# Altium PCB STM32PCB_brd.PcbDoc
Units mm, origin at the board's own origin, x right, y up, seen from the top; angles counter-clockwise.
Board outline 36 x 36 mm, 4 copper layers (L1 (Signal), L2 (GND), L2 (GND) (Mid2), L4 (Signal)), stack 1.57 mm thick; 35 components, 27 nets, 172 pads, 80 vias.
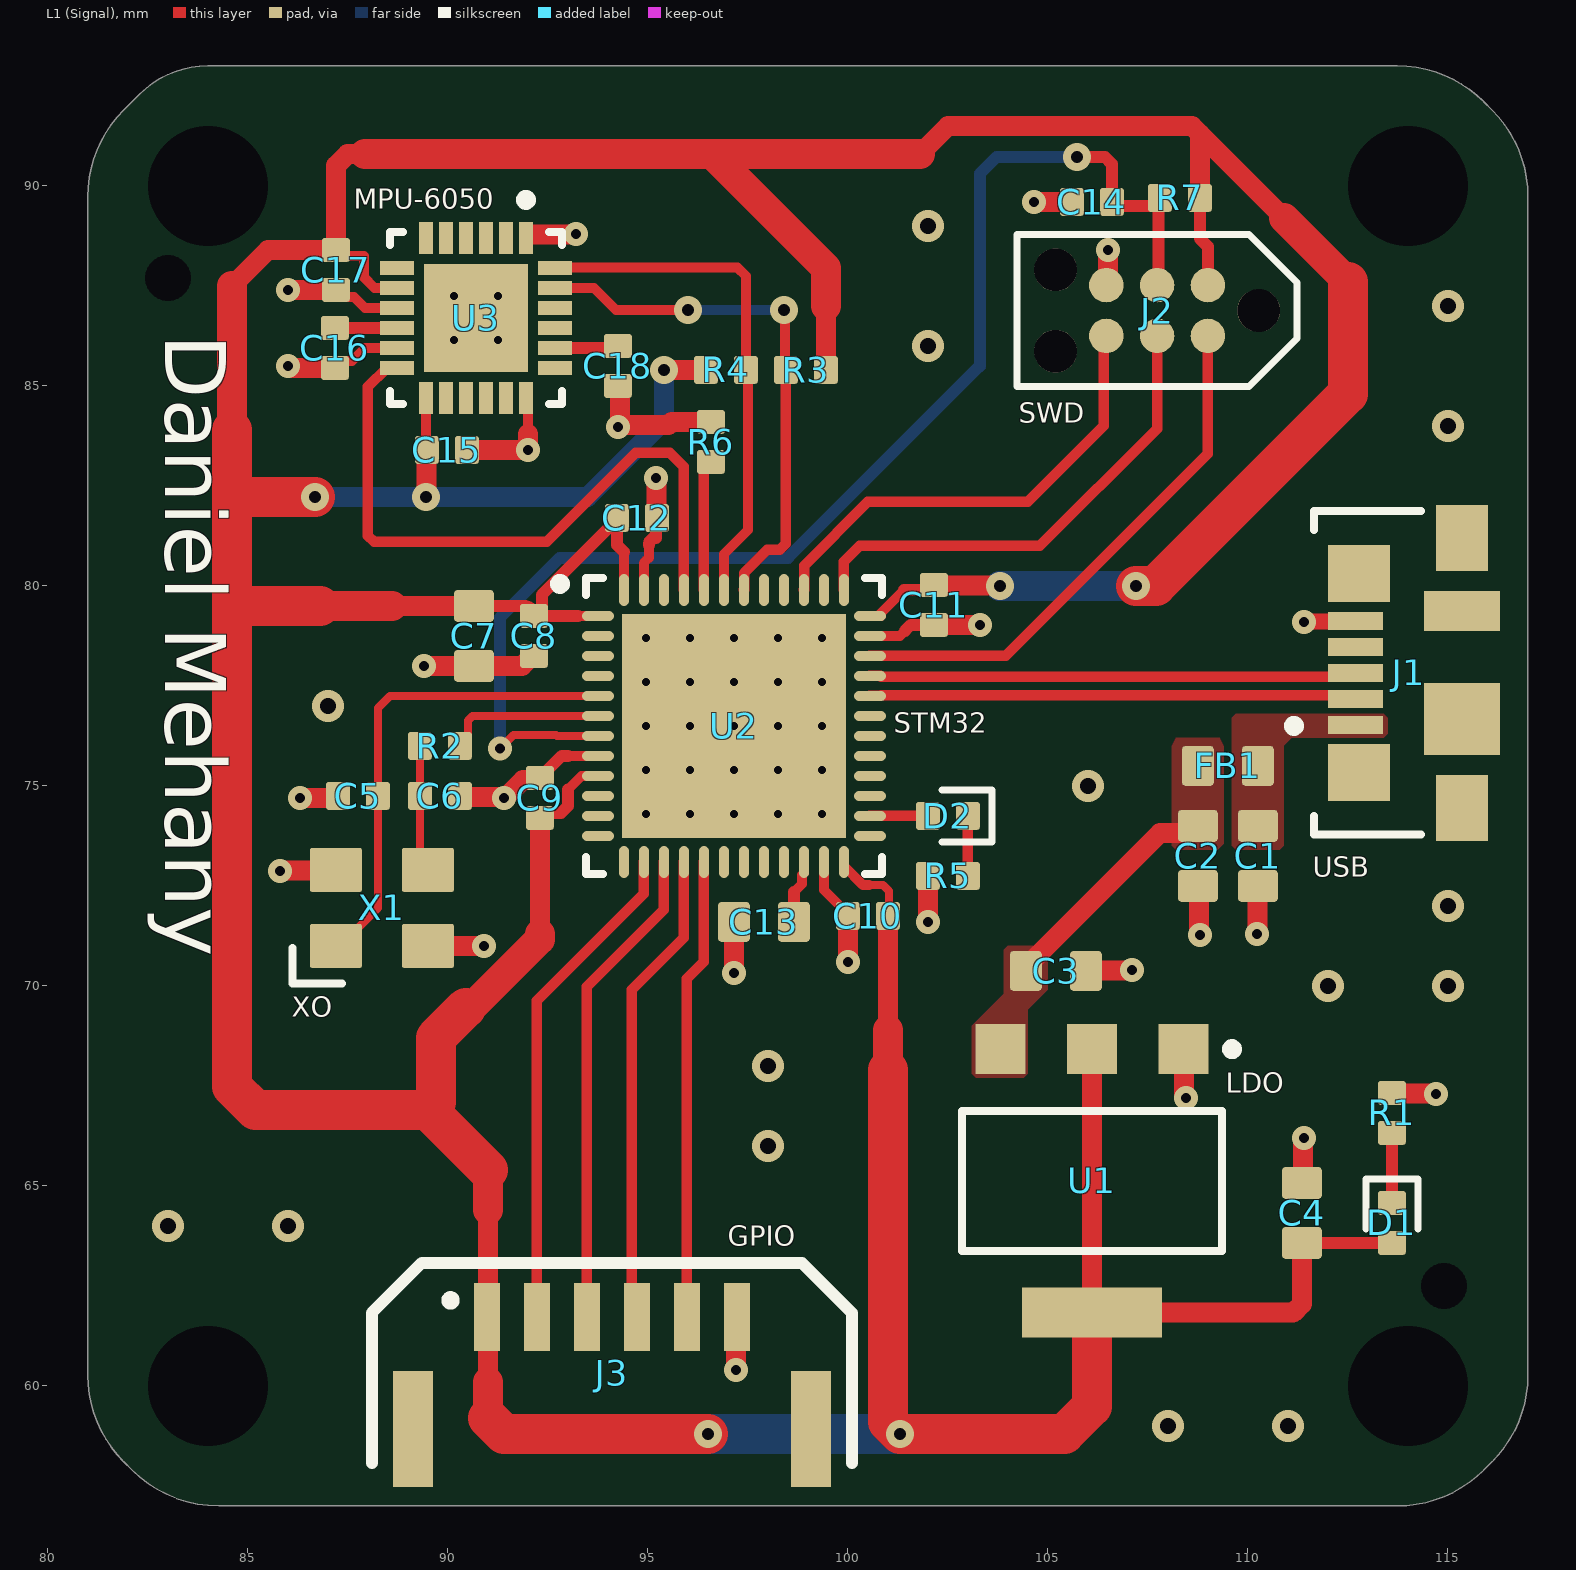
[diagram p0: L1 (Signal) view]
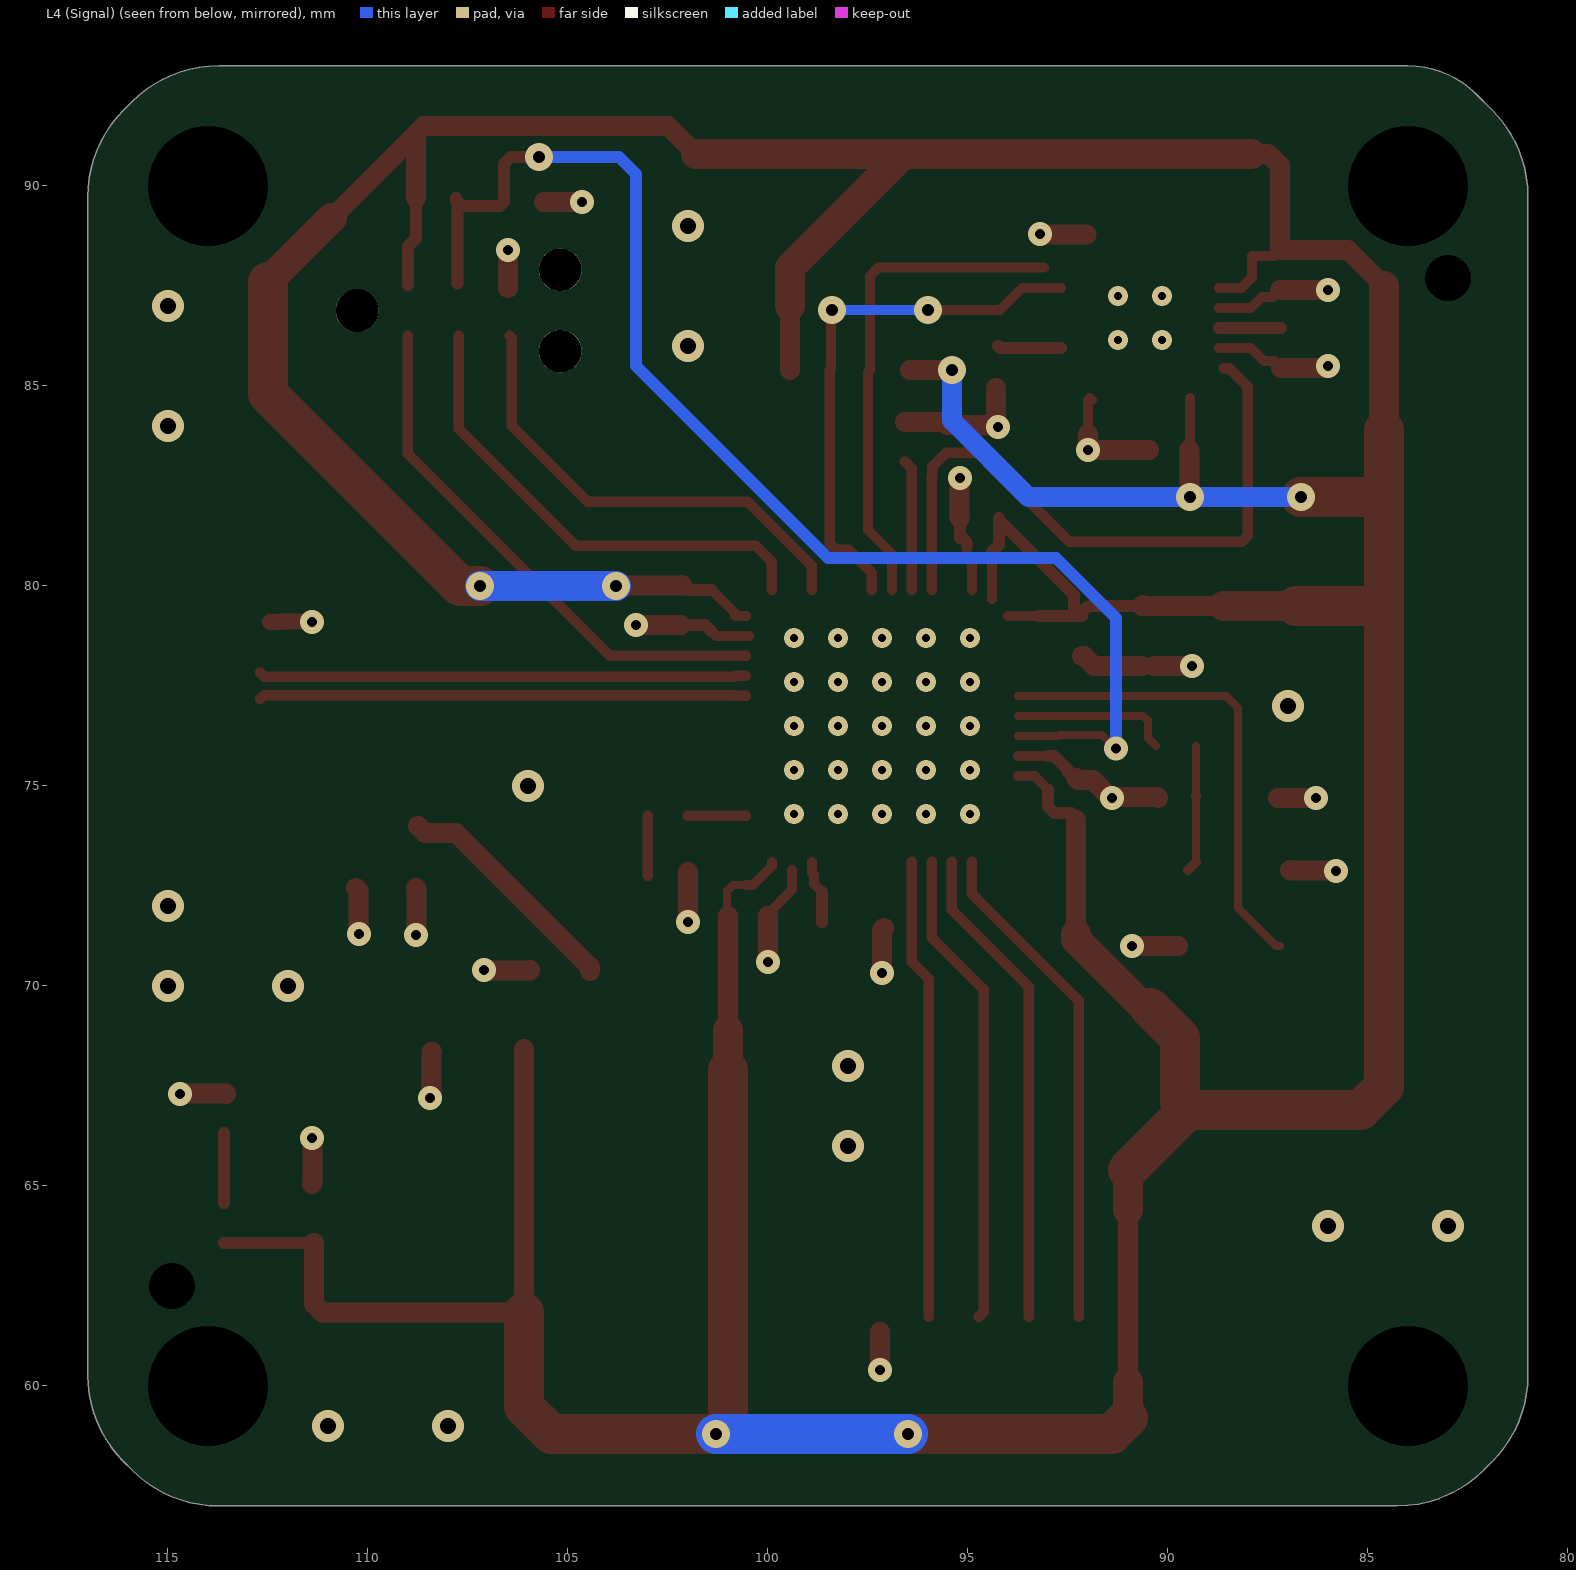
[diagram p1: L4 (Signal) view, seen from below]
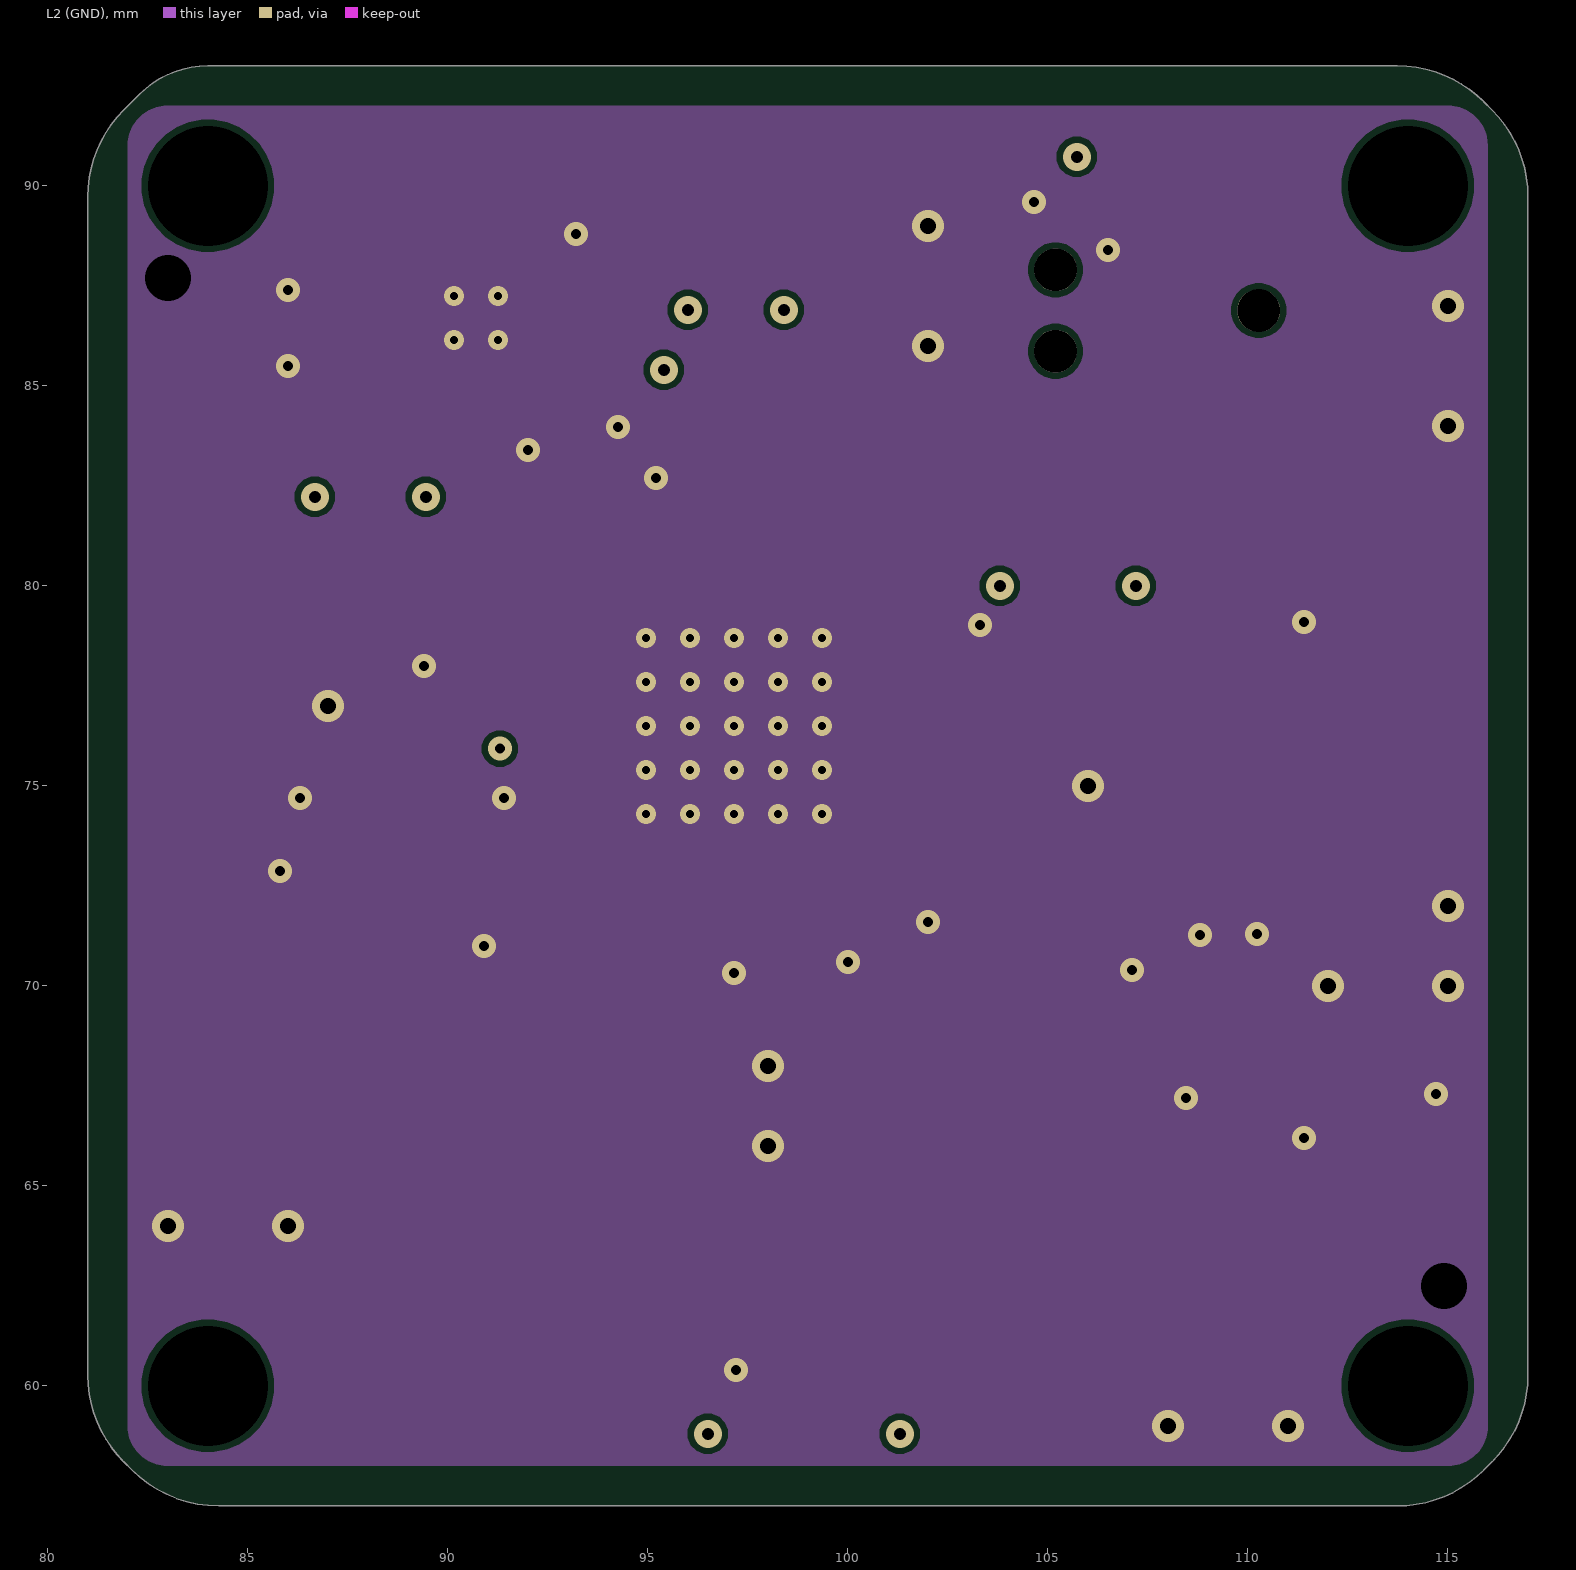
[diagram p2: L2 (GND)]
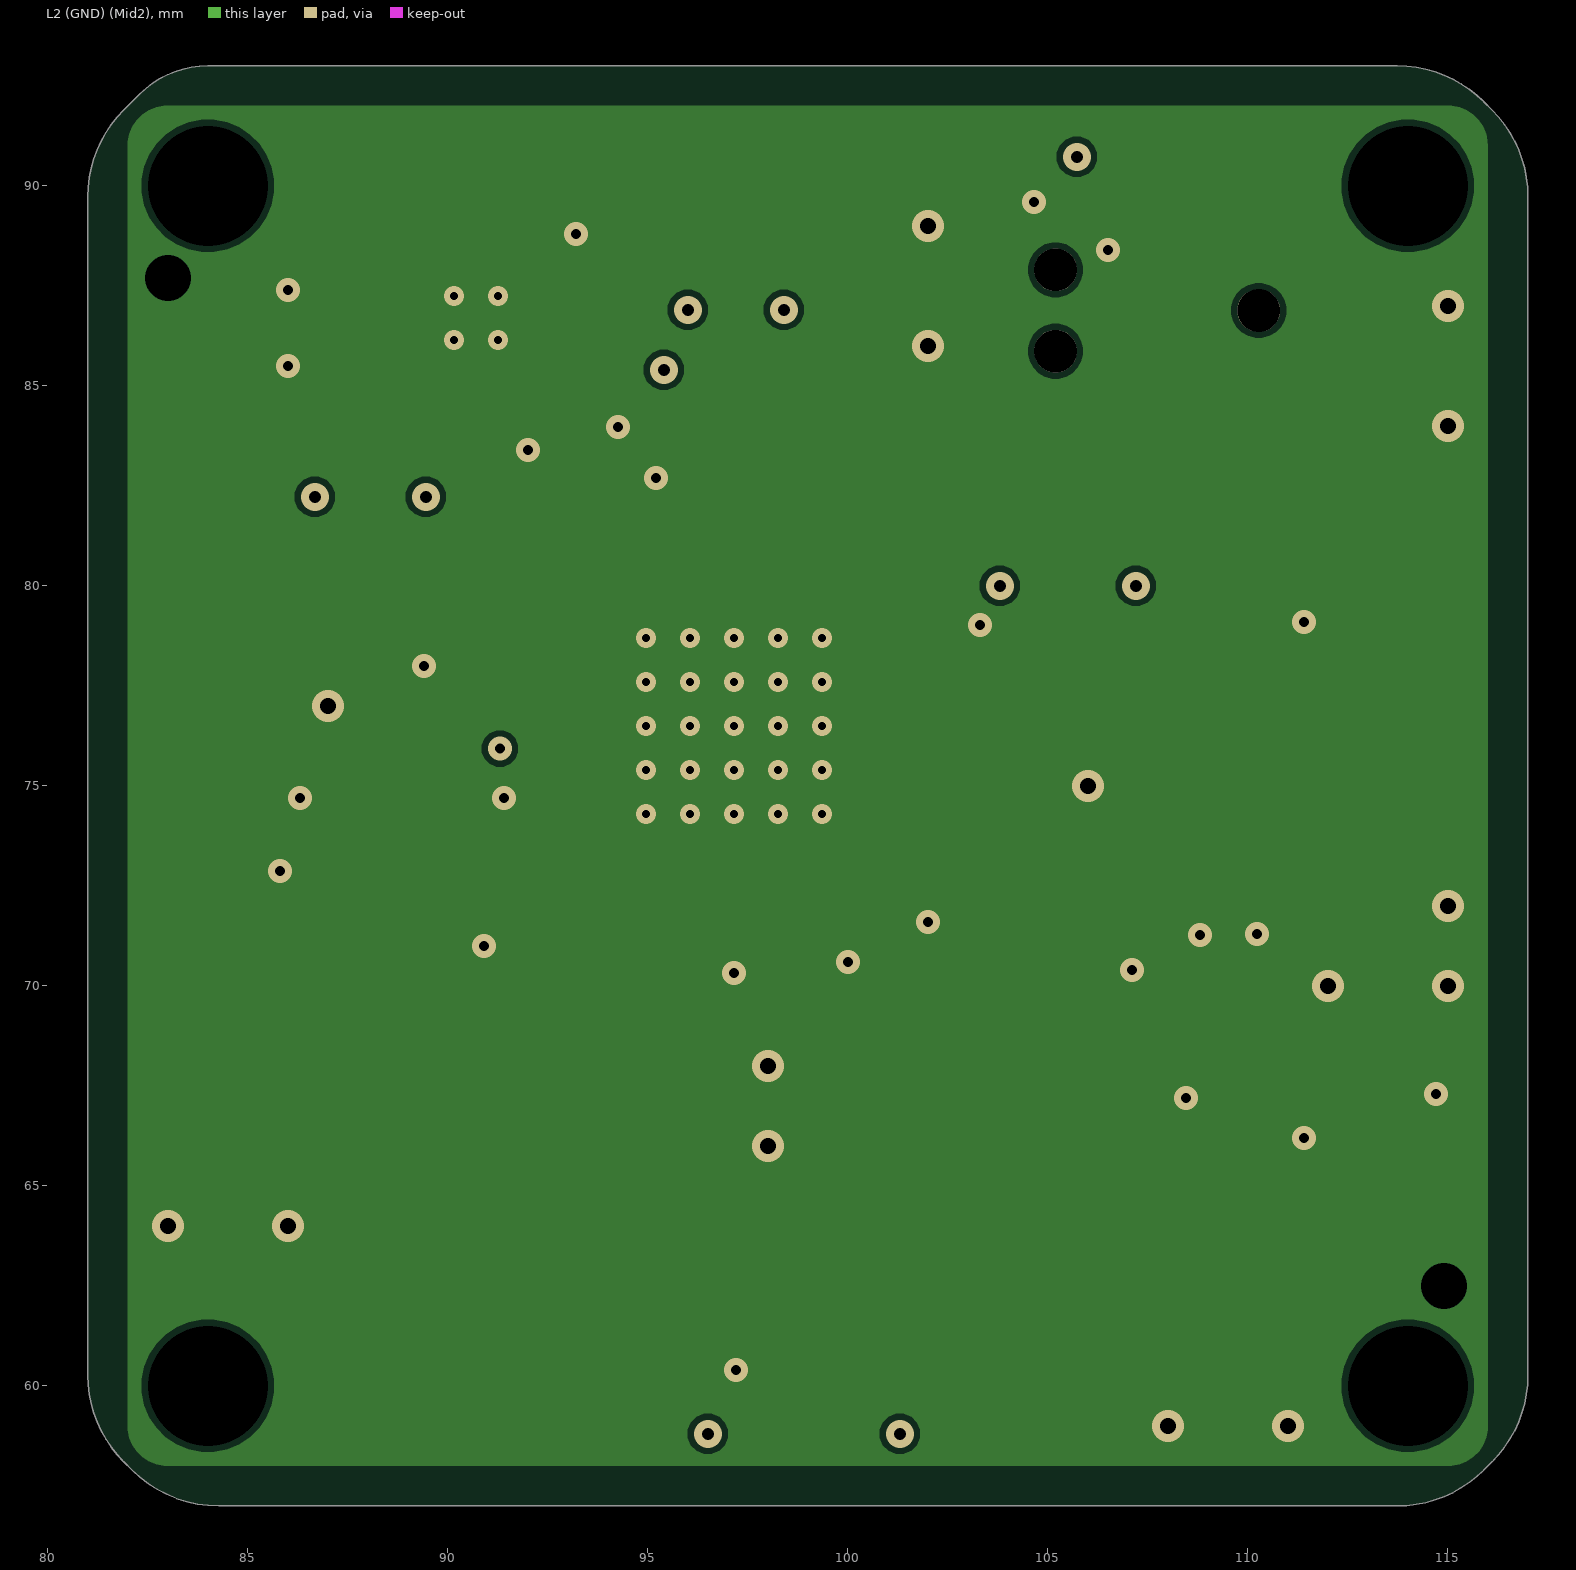
[diagram p3: L2 (GND) (Mid2)]
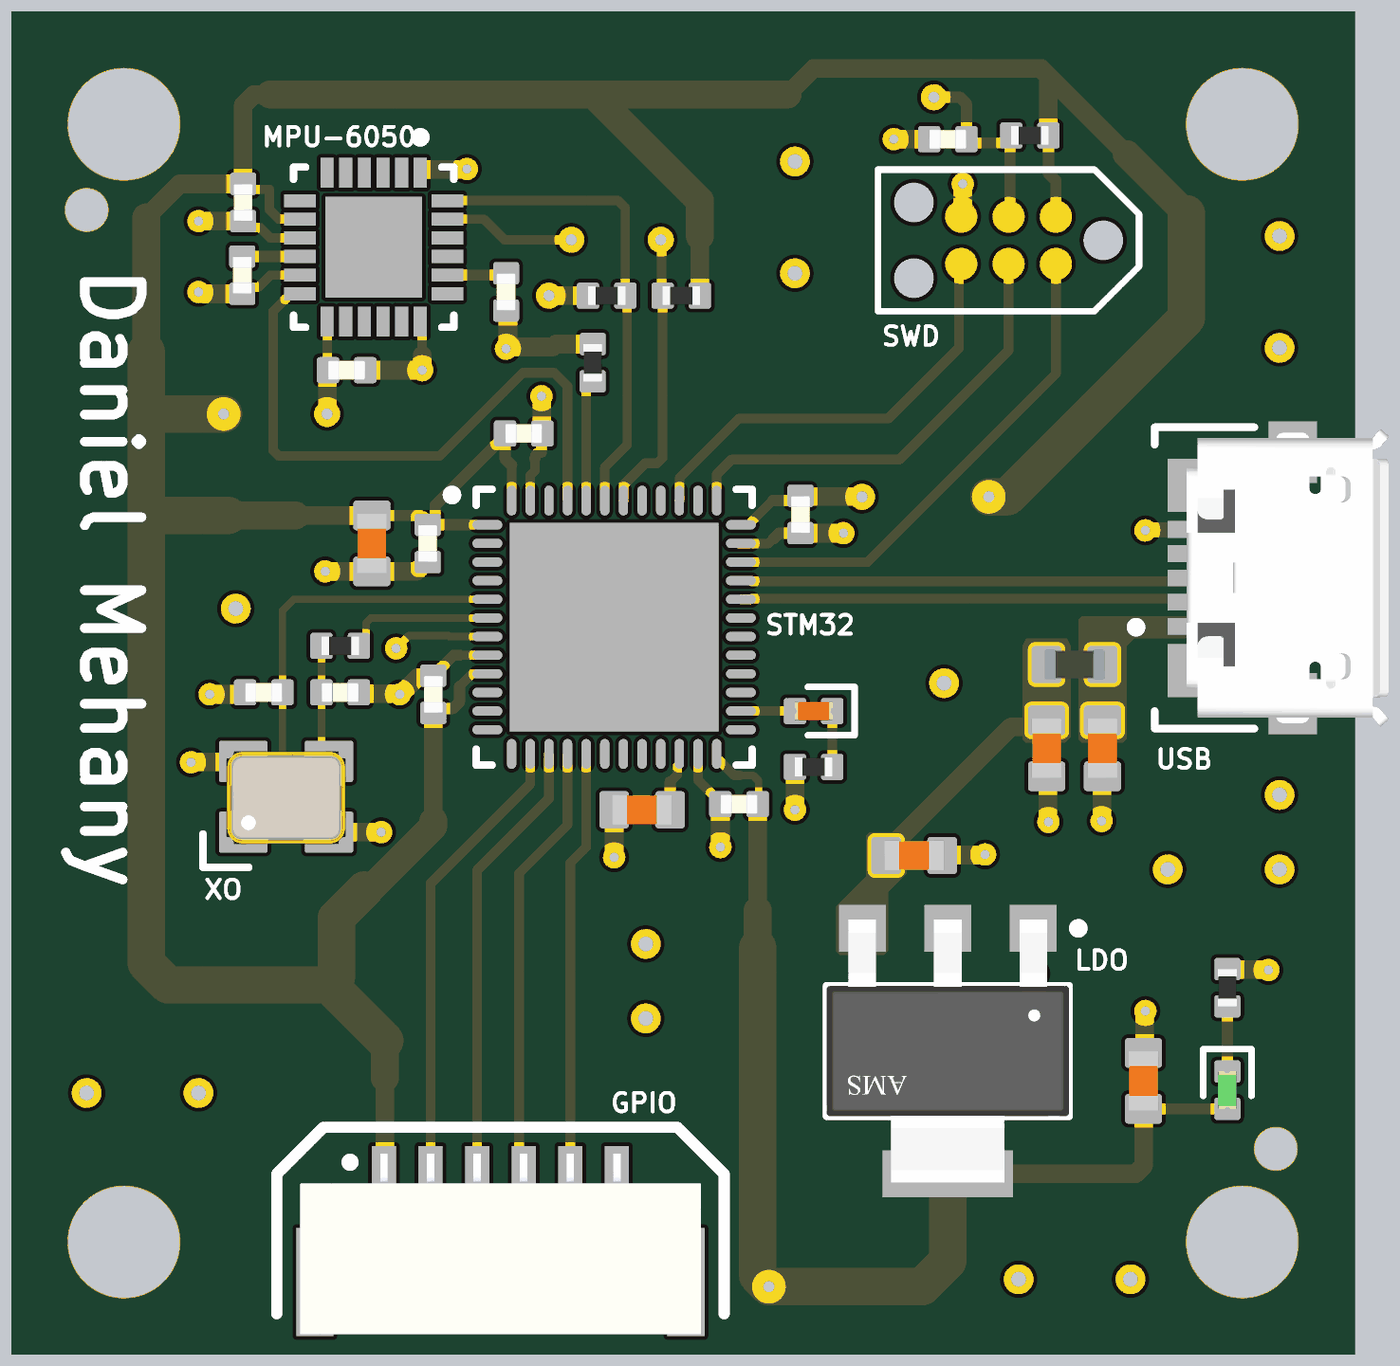
[diagram p4: 3D render of the assembled board from above, using the file's embedded part models]

## Layer stack, top to bottom
Top Solder: solder mask 0.0254, SM-001, Dk 4
L1 (Signal): signal copper 0.035
Dielectric 1: prepreg 0.2, PP-017, Dk 4.6
L2 (GND): signal copper 0.0175
Dielectric 3: core 1.065, Core-039, Dk 4.6
L2 (GND) (Mid2): signal copper 0.0175
Dielectric 5: prepreg 0.2, PP-017, Dk 4.6
L4 (Signal): signal copper 0.035
Bottom Solder: solder mask 0.0254, SM-001, Dk 4

## Board outline
81.898,58.102 cw(c84.066,60.27) 81,60.27 81,89.73 cw(c84.066,89.73) 81.898,91.898 82.293,92.293 cw(c84,90.586) 84,93 113,93 113.73,93 cw(c113.73,89.934) 115.898,92.102 116.102,91.898 cw(c113.934,89.73) 117,89.73 117,60.27 cw(c113.934,60.27) 116.102,58.102 115.898,57.898 cw(c113.73,60.066) 113.73,57 84.27,57 cw(c84.27,60.066) 82.102,57.898

## Design rules (kind name [scope] priority, off if disabled: settings)
Clearance [All] p1: gap=0.15 ignorepadtopadclearanceinfootprint=FALSE
DiffPairsRouting [All] p1: maxlimit=0.254 minlimit=0.203 mostfreqgap=0.254 toplayer_maxgap=0.203 toplayer_prefgap=0.203 toplayer_minwidth=0.26 toplayer_maxwidth=0.26 toplayer_prefwidth=0.26 bottomlayer_maxgap=0.203 bottomlayer_prefgap=0.203 bottomlayer_minwidth=0.26 bottomlayer_maxwidth=0.26 bottomlayer_prefwidth=0.26 impedanceprofiledriven=TRUE impedanceprofileid={F5B45818-6CCE-4C37-A667-58EC9C0AF77E} impedanceprofilevalue=90.000000 maxuncoupledlength=12.7
HoleSize [All] p1: absolutevalues=TRUE maxlimit=3 minlimit=0.2 maxpercent=80.000 minpercent=20.000
MinimumSolderMaskSliver [All] p1: minsoldermaskwidth=0
PolygonConnect [All] p1: connectstyle=Direct reliefconductorwidth=0.254 reliefentries=4 polygonreliefangle="90 Angle" airgapwidth=0.254
RoutingVias [All] p1: holewidth=0.3 width=0.7 viastyle="Through Hole" minholewidth=0.25 minwidth=0.55 maxholewidth=0.4 maxwidth=0.9
SilkToSilkClearance [All] p1: silktosilkclearance=0.15
SilkToSolderMaskClearance [IsPad] p1: minsilkscreentomaskgap=0.15 clearancetoexposedcopper=TRUE
SolderMaskExpansion [All] p1: expansion=0.102 istentingtop=FALSE
SupplyNets "Schematic Supply Nets_4" [InNet('+5V')] p1: voltage=0.000
SupplyNets "Schematic Supply Nets_3" [InNet('+3.3V')] p2: voltage=0.000
SupplyNets "Schematic Supply Nets_1" [InNet('VBUS')] p3: voltage=0.000
SupplyNets "Schematic Supply Nets" [InNet('GND')] p4: voltage=0.000
UnRoutedNet [All] p1: checkbadconnections=TRUE
Width [All] p1: maxlimit=1 minlimit=0.2 preferedwidth=0.3 midlayer1_minwidth=0.254 midlayer1_maxwidth=0.254 midlayer1_prefwidth=0.254 midlayer2_minwidth=0.254 midlayer2_maxwidth=0.254 midlayer2_prefwidth=0.254 minimp=50.000000 maximp=50.000000 favimp=50.000000
24 further rules are at their usual default settings.

## Classes and differential pairs
differential pair USB_D: +USB_D_P -USB_D_N

## Components (designator, comment, footprint, x,y, rotation, side; value= is the part's Value field where it differs from the comment)
C1 "2.2u" CAP_0603 110.25,73.25 r90 top
C2 "2.2u" CAP_0603 108.75,73.25 r90 top
C3 "22u" CAP_0603 105.2,70.375 r180 top
C4 "22u" CAP_0603 111.35,64.325 r270 top
C5 "10p" CAP_0402 87.75,74.75 r0 top
C6 "10p" CAP_0402 89.8,74.75 r180 top
C7 "2.2u" CAP_0603 90.65,78.75 r90 top
C8 "C0402_16V" CAP_0402 92.15,78.75 r90 top value=100n
C9 "C0402_16V" CAP_0402 92.3,74.7 r270 top value=100n
C10 "C0402_16V" CAP_0402 100.5,71.75 r0 top value=100n
C11 "C0402_16V" CAP_0402 102.15,79.525 r90 top value=100n
C12 "C0402_16V" CAP_0402 94.725,81.7 r180 top value=100n
C13 "2.2u" CAP_0603 97.9,71.6 r0 top
C14 "C0402_16V" CAP_0402 106.1,89.6 r0 top value=100n
C15 "C0402_16V" CAP_0402 89.975,83.4 r180 top value=100n
C16 "C0402_16V" CAP_0402 87.175,85.95 r90 top value=100n
C17 "C0402_16V" CAP_0402 87.2,87.9 r90 top value=10n
C18 "C0402_16V" CAP_0402 94.25,85.5 r90 top value=2.2n
D1 "GREEN" LED_0402_GREEN 113.6,64.075 r90 top
D2 "RED" LED_0402_RED 102.5,74.25 r0 top
FB1 "120R" FB_0603 109.5,75.5 r180 top
J1 "473460001" FP-473460001-MFG 115,77.825 r90 top
J2 "TC2030-NL" TC2030-NL-FP 107.73,86.885 r180 top
J3 "SM06B-GHS-TB" SM06B-GHS-TB 94.1,60.325 r0 top
R1 "1K" RES_0402 113.6,66.825 r270 top
R2 "0R" RES_0402 89.8,76 r0 top
R3 "2.2K" RES_0402 98.95,85.4 r0 top
R4 "2.2K" RES_0402 96.95,85.4 r180 top
R5 "1K" RES_0402 102.5,72.75 r0 top
R6 "10k" RES_0402 96.575,83.6 r270 top
R7 "10k" RES_0402 108.3,89.7 r0 top
U1 "AMS1117-3.3" FP-AMS1117-IPC_C 106.1,65.125 r270 top
U2 "STM32F411CEU6" STM-UFQFPN48_L 97.15,76.5 r0 top
U3 "MPU-6050" IS-QFN-24_V 90.7,86.7 r270 top
X1 "24MHz" XTAL_3225 88.35,71.95 r0 top

## Footprints (in the part's own frame and the unit in brackets; to place one, negate y for a bottom-side part, rotate by r counter-clockwise, add the part's x,y. Pads: shape width x height; smd on the part's side, far side on the other; paste and mask are expansions set on the pad)
CAP_0402 [mm]
  rrect25% 0.6x0.7 smd: 1(-0.5,0) 2(0.5,0)
  body extent -0.5,-0.26 0.5,0.26, height 0.37
CAP_0603 [mm]
  rrect25% 0.8x1 smd: 1(-0.75,0) 2(0.75,0)
  body extent -0.8,-0.4 0.8,0.4, height 0.51
FB_0603 [mm]
  rrect25% 0.8x1 smd: 1(-0.75,0) 2(0.75,0)
  body extent -0.8,-0.4 0.8,0.4, height 0.81
FP-473460001-MFG [mm]
  rect 0.45x1.38 smd paste+0 mask+0: 1(-1.3,2.31) 2(-0.65,2.31) 3(0,2.31) 4(0.65,2.31) 5(1.3,2.31)
  rect 1.425x1.55 smd paste+0 mask+0: 6(-2.488,2.225) 7(2.488,2.225)
  rect 1.65x1.3 smd paste+0 mask+0: 8(-3.375,-0.35) 11(3.375,-0.35)
  rect 1.8x1.9 smd paste+0 mask+0: 9(-1.15,-0.35)
  rect 1x1.9 smd paste+0 mask+0: 10(1.55,-0.35)
  silkscreen extent -4.05,0.67 4.05,3.97, body extent -4.3,-2.48 4.3,3.45, height 0.25
FP-AMS1117-IPC_C [mm]
  rect 1.25x1.25 smd paste-2539.97 mask-2539.97: 1(-3.295,2.29) 2(-3.295,0) 3(-3.295,-2.29)
  rect 1.25x3.5 smd paste+0 mask+0: 4(3.295,0)
  silkscreen extent -3.42,-3.25 1.75,3.63, body extent -3.9,-3.35 3.9,3.35, height 0.25
IS-QFN-24_V [mm] "QFN, 24-Leads, Body 4x4mm, Pitch 0.5mm, Thermal Pad 2.7x2.6mm"
  rect 0.8x0.35 smd: 1(-2,1.25) 2(-2,0.75) 3(-2,0.25) 4(-2,-0.25) 5(-2,-0.75) 6(-2,-1.25) 13(2,-1.25) 14(2,-0.75) 15(2,-0.25) 16(2,0.25) 17(2,0.75) 18(2,1.25)
  rect 0.35x0.85 smd mask+0.102: 7(-1.25,-1.975) 8(-0.75,-1.975) 9(-0.25,-1.975) 10(0.25,-1.975) 11(0.75,-1.975) 12(1.25,-1.975) 19(1.25,1.975) 20(0.75,1.975) 21(0.25,1.975) 22(-0.25,1.975) 23(-0.75,1.975) 24(-1.25,1.975)
  rect 2.7x2.6 smd: 25(0,0)
  silkscreen extent -3.07,-2.15 2.15,2.15, body extent -2,-2 2,2, height 0.95
LED_0402_GREEN [mm]
  rrect25% 0.6x0.7 smd: A(-0.5,0) K(0.5,0)
  silkscreen extent -0.15,-0.65 1.1,0.65, body extent -0.51,-0.25 0.51,0.25, height 0.45
LED_0402_RED [mm]
  rrect25% 0.6x0.7 smd: A(-0.5,0) K(0.5,0)
  silkscreen extent -0.15,-0.65 1.1,0.65, body extent -0.51,-0.25 0.51,0.25, height 0.45
RES_0402 [mm]
  rrect25% 0.6x0.7 smd: 1(-0.5,0) 2(0.5,0)
  body extent -0.5,-0.25 0.5,0.25, height 0.3
SM06B-GHS-TB [mm]
  rect 0.65x1.7 smd: 1(-3.125,1.4) 2(-1.875,1.4) 3(-0.625,1.4) 4(0.625,1.4) 5(1.875,1.4) 6(3.125,1.4)
  rect 1x2.9 smd: ""(-4.975,-1.4) ""(4.975,-1.4)
  silkscreen extent -6,-2.25 6,2.75, body extent -5.38,-2.8 5.38,2.05, height 4.26
STM-UFQFPN48_L [mm] "QFN, 48-Leads, Body 7.1x7.1mm, Pitch 0.5mm, Thermal Pad 5.6x5.6mm, IPC High Density"
  oval 0.8x0.25 smd: 1(-3.4,2.75) 2(-3.4,2.25) 3(-3.4,1.75) 4(-3.4,1.25) 5(-3.4,0.75) 6(-3.4,0.25) 7(-3.4,-0.25) 8(-3.4,-0.75) 9(-3.4,-1.25) 10(-3.4,-1.75) 11(-3.4,-2.25) 12(-3.4,-2.75) 25(3.4,-2.75) 26(3.4,-2.25) 27(3.4,-1.75) 28(3.4,-1.25) 29(3.4,-0.75) 30(3.4,-0.25) 31(3.4,0.25) 32(3.4,0.75) 33(3.4,1.25) 34(3.4,1.75) 35(3.4,2.25) 36(3.4,2.75)
  oval 0.25x0.8 smd: 13(-2.75,-3.4) 14(-2.25,-3.4) 15(-1.75,-3.4) 16(-1.25,-3.4) 17(-0.75,-3.4) 18(-0.25,-3.4) 19(0.25,-3.4) 20(0.75,-3.4) 21(1.25,-3.4) 22(1.75,-3.4) 23(2.25,-3.4) 24(2.75,-3.4) 37(2.75,3.4) 38(2.25,3.4) 39(1.75,3.4) 40(1.25,3.4) 41(0.75,3.4) 42(0.25,3.4) 43(-0.25,3.4) 44(-0.75,3.4) 45(-1.25,3.4) 46(-1.75,3.4) 47(-2.25,3.4) 48(-2.75,3.4)
  rect 5.6x5.6 smd: 49(0,0)
  silkscreen extent -4.47,-3.7 3.7,3.7, body extent -3.55,-3.55 3.55,3.55, height 0.6
TC2030-NL-FP [mil]
  round 33.98 smd paste-16.99: 1(-50,-25) 2(-50,25) 3(0,-25) 4(0,25) 5(50,-25) 6(50,25)
  round 42.01 hole 42.01 unplated: MH(-100,0) MH(100,-40) MH(100,40)
  silkscreen extent -138,-75 138,75
XTAL_3225 [mm]
  rrect10% 1.3x1.1 smd: 1(-1.15,-0.95) 2(1.15,-0.95) 3(1.15,0.95) 4(-1.15,0.95)
  silkscreen extent -2.23,-1.89 -1,-1, body extent -1.6,-1.28 1.6,1.22, height 0.61

## Part data
C1 C2 C3 C4 C7 C13: library part CAP_0603, "Capacitor SMD 0603"
C5 C6 C8 C9 C10 C11 C12 C14 C15 C16 C17 C18: library part CAP_0402, "Capacitor SMD 0402"
D1: library part LED_0402_GREEN, "LED 0402 GREEN SMD"
D2: library part LED_0402_RED, "LED 0402 RED SMD"
FB1: library part FB_0603, "Ferrite Bead SMD 0603"
J1: library part CMP-2000-05246-2, "CONN RCPT USB2.0 MICRO B SMD R/A", Current Rating=1.8A, Manufacturer=Molex, Package=0, Temperature="-30°C to +85°C", Temperature Range High=+85°C, Temperature Range Low=-30°C, Voltage Rating=30V, Automotive=No, Category=Conn, ComponentLink2Description=Datasheet, ComponentLink2URL=https://www.molex.com/webdocs/datasheets/pdf/en-us/0473460001_IO_CONNECTORS.pdf, Conn Orientation="Right Angle", Contact Material=Gold,Nickel, Device Class L1=Connectors, Device Class L2="USB Connectors", Device Class L3=unset, Digikey Description="CONN RCPT USB2.0 MICRO B SMD R/A", Footprint Url=https://www.molex.com/pdm_docs/sd/473460001_sd.pdf, Height=2.945mm, Is Female=yes, Lead Free=Yes, Manufacturer Part Number=473460001, Number Of Contacts=5, Octopart=https://octopart.com/47346-0001-molex-7164928, Pitch=0.65mm, RoHS=TRUE, Shielding=true, Usb Standard="USB 2.0"
J2: "Tag-Connect No-Solder SWD Debug Connector (No Legs) DO NOT PLACE", Manufacturer=Tag-Connect, Manufacturer Part Number=TC2030-NL-FP
J3: "Header Connector 6 Position 1.25MM Pitch SMD Horizontal JST GH", Manufacturer=JST, Manufacturer Part Number=SM06B-GHS-TB
R1 R2 R3 R4 R5 R6 R7: library part RES_0402, "Resistor SMD 0402"
U1: library part CMP-209535-000001-1, "LDO Voltage Regulators 1A, 3.3V", Dropout Voltage=1.1V, Manufacturer="Advanced Monolithic Systems", Max Junction Temp=+125°C, Max Power Dissipation=1.2W, Max Supply Voltage=15V, Nominal Supply Current=5mA, Output Current=1A, Output Voltage=3.3V, Package=AMS1117, Temperature="-40°C to +125°C", Temperature Range Low=-40°C, Automotive=No, Category=IC, ComponentLink2Description=Datasheet, ComponentLink2URL=http://www.advanced-monolithic.com/pdf/ds1117.pdf, Device Class L1="Integrated Circuits (ICs)", Device Class L2="Power Management ICs", Device Class L3="Voltage Regulators - Linear", Height=1.8mm, Ipc Land Pattern Name=SOT229P700X180-4, Lead Free=Yes, Manufacturer Part Number=AMS1117-3.3, Number Of Outputs=1, Octopart=https://octopart.com/ams1117-3.3-advanced+monolithic+systems-25899300, Output Type=Fixed, RoHS=TRUE, Standoff Height=0.64mm, Temperature Range High=+125°C
U2: library part CMP-0243-00165-1, "ARM Cortex-M4 32-bit MCU+FPU, 512 KB Flash, 128 KB RAM, 36 I/Os, 48-Pin UFQFPN, -40 to 85 degC, Tray", I/Os (High Current)=36, Operating Frequency(F) (Processor speed) (MHz)=100, Package Description=UFQFPN48, Package Reference="48-Pin Ultra Thin Fine Pitch Quad Flat No-Lead, 7 x 7 x 0.6 mm Body, 0.5 mm Pitch, Exposed Pad", Supply Voltage(Vcc) min (V)=1.7, ComponentLink1Description="Manufacturer URL", ComponentLink1URL=http://www.st.com/, ComponentLink2Description=Datasheet, ComponentLink2URL=http://www.st.com/st-web-ui/static/active/en/resource/technical/document/datasheet/DM00115249.pdf, Core="ARM Cortex-M4", DatasheetVersion="Rev. 6", FLASH Size (Prog) (kB)=512, Internal RAM Size (kB)=128, Mounting Technology="Surface Mount", Packing=Tray
U3: library part CMP-1753-00002-2, "3-Axis Gyroscope, Accelerometer and a Digital Motion Processor(TM) (DMP), 2.375 to 3.46 V, -40 to 85 degC, 24-Pin QFN, RoHS, Tape and Reel", Manufacturer=InvenSense, Standard Package=5,000, Category=Sensors,Transducers, Datasheet URL=http://datasheet.octopart.com/MPU-6050-InvenSense-datasheet-14421344.pdf, Datasheet Version="Rev. 3.3, 05/2012", Dynamic Catalog=MPU-6000™Series, Family=Multifunction, Featured Product=MPU-60506-Axis,IntegratedI²CSolution, Manufacturer URL=http://www.invensense.com/, Online Catalog=MPU-6000™Series, Other Names="1428-1007-2 / MPU6050", Output Type=Digital, Sensor Type=MotionTracking, Unit PriceUSD=Digital
X1: library part TSX-3225_24.0000MF15X-AC, "Crystal SMD 24MHz 10PPM 7pF 3225", Manufacturer=Epson, Manufacturer Part Number="TSX-3225 24.0000MF15X-AC"

## Free pads (board coordinates)
  round 1.524 hole 3: MH(84,60) MH(84,90) MH(114,60) MH(114,90)
  round 0 hole 1.152: TH(83,87.7) TH(114.9,62.5)

## Via types
v1: diameter 0.5, hole 0.2, L1 (Signal) to L4 (Signal), 29 vias
v2: diameter 0.6, hole 0.25, L1 (Signal) to L4 (Signal), 26 vias
v3: diameter 0.8, hole 0.4, L1 (Signal) to L4 (Signal), 15 vias
v4: diameter 0.7, hole 0.3, L1 (Signal) to L4 (Signal), 10 vias

## Nets (pads, with @x,y where several pads share a name; then routed paths per layer and width w, separated by ;. In a path a pad name is that pad's centre, name@x,y a point inside that pad or via, vN(x,y) a via of type N, cw(c..) or ccw(c..) an arc to the next point about the centre after c; other vN are vias at no path point)
+3.3V: C4.2 C7.2 C8.2 C9.2 C10.2 C11.2 C12.2 C15.2 C17.2 D1.A J2.1 J3.1 R3.2 R4.2 R7.2 U1.2 U1.4 U2.1 U2.9 U2.24 U2.36 U2.48 U3.8 U3.13 | length 186.6
  L1 (Signal) w0.2: 100.525,72.525 100.875,72.525 101.025,72.375 101.025,71.775 C10.2
  L1 (Signal) w0.25: C17.2 87.346,88.254 87.9,88.254 87.9,87.715 88.165,87.45 U3.8 ; U3.13 89.45,83.425 C15.2 ; 93,74.911 93.339,75.25 U2.9 ; 93.25,79.25 U2.1 U2.1@94,79.25 ; U2.48@94.4,79.675 U2.48 94.4,80.85 ; U2.24 99.9,72.996 100.371,72.525 100.525,72.525 ; U2.36 100.825,79.25 100.825,79.32 101.405,79.9
  L1 (Signal) w0.3: C7.2 91.9,79.5 cw(c91.9,79.25) C8.2 ; C9.2 92.418,74.318 92.824,74.318 93,74.494 93,74.911 ; 93.25,79.25 C8.2 ; C12.2 C12.2@94.225,81.65 ; 94.4,80.85 94.225,81.025 C12.2@94.225,81.65 ; 101.405,79.9 102.025,79.9 C11.2 ; R7.2 108.8,88.686 109,88.486 J2.1 ; C4.2 D1.A ; C8.2 92.2,79.25 92.35,79.4 92.35,79.775 C12.2@94.225,81.65
  L1 (Signal) w0.5: 84.6,87.5 85.5,88.4 C17.2 87.2,90.507 87.493,90.8 87.925,90.8 ; 88.6,79.5 C7.2 C7.2@90.625,79.525 ; v4(89.45,82.225) 89.463,82.238 89.463,83.388 C15.2 ; 91,60.1 J3.1@91,61.7 ; J3.1@91,61.55 91,64.4 ; 92.3,71.3 C9.2@92.3,74.15 ; v4(95.4,85.4) R4.2 ; R3.2 99.45,87 ; 101,68.9 C10.2 ; 101.8,90.8 102.5,91.5 108.6,91.5 108.8,91.3 ; C11.2 102.163,80.012 103.788,80.012 v4(103.8,80) ; U1.2 U1.4 111.13,61.83 111.35,62.05 C4.2 ; R7.2 108.8,91.3 ; 110.9,89.2 108.8,91.3
  L1 (Signal) w0.75: 84.6,83.9 84.6,87.5 ; 86.8,79.5 88.6,79.5 ; 87.925,90.8 96.6,90.8 ; 90.45,69.45 90.587,69.45 92.3,71.163 92.3,71.3 ; 91,59.2 91,60.1 ; 91,64.4 91,65.4 ; 99.45,87 99.45,87.95 96.6,90.8 ; 101,67.9 101,68.9 ; 101.8,90.8 96.6,90.8 ; 110.9,89.2 112.5,87.6
  L1 (Signal) w1: 84.6,83.9 84.6,82.225 ; v4(86.675,82.225) 84.6,82.225 ; 86.8,79.5 84.6,79.5 ; 90.45,69.45 89.7,68.7 89.7,67.1 89.5,66.9 ; 91,59.2 91.4,58.8 v4(96.5,58.8) ; 91,65.4 89.5,66.9 ; 101,67.9 101,59.1 v4(101.3,58.8) 105.414,58.8 106.1,59.486 U1.4 ; v4(107.2,80) 107.7,80 112.5,84.8 112.5,87.6 ; 84.6,79.5 84.6,82.225 ; 84.6,79.5 84.6,67.486 85.186,66.9 89.5,66.9
  L4 (Signal) w0.5: v4(86.675,82.225) v4(89.45,82.225) 93.49,82.225 95.4,84.135 v4(95.4,85.4)
  L4 (Signal) w0.75: v4(103.8,80) v4(107.2,80)
  L4 (Signal) w1: v4(96.5,58.8) v4(101.3,58.8)
+5V: C2.2 C3.2 FB1.2 U1.3 | length 5.9
  L1 (Signal) w0.5: C3.2 104.45,70.475 107.8,73.825 108.575,73.825 C2.2
GND: C1.1 C2.1 C3.1 C4.1 C5.1 C6.1 C7.1 C8.1 C9.1 C10.1 C11.1 C12.1 C13.1 C14.1 C15.1 C16.1 C17.1 C18.1 J1.5 J2.5 J3.6 pad.TH R1.1 R5.1 R6.1 U1.1 U2.8 U2.23 U2.35 U2.47 U2.49 U3.1 U3.9 U3.11 U3.18 U3.25 X1.2 X1.4 | length 44.9
  L1 (Signal) w0.25: C16.1 87.35,85.625 87.6,85.625 87.925,85.95 U3.11 ; C17.1 87.375,87.225 87.65,87.225 87.925,86.95 U3.9 ; U3.18@91.9,84.65 U3.18 92,84.65 92,83.8 ; 93,75.75 U2.8 ; U2.47 94.9,80.575 94.959,80.645 cw(c95.15,80.483) 95.025,80.7 95.025,81.025 ; U2.23@99.404,72.9 99.404,72.396 100,71.8 C10.1 ; U2.35@100.475,78.746 101.296,78.746 101.425,78.875
  L1 (Signal) w0.3: C9.1 92.35,75.2 92.5,75.35 92.5,75.4 92.85,75.75 93,75.75 ; 95.025,81.025 cw(c95.2,81.025) 95.2,81.2 C12.1@95.2,81.675 ; 101.425,78.875 101.575,79.025 C11.1
  L1 (Signal) w0.4: C12.1@95.2,81.675 cw(c95.225,81.675) C12.1 ; v2(111.4,79.1) 111.413,79.112 112.2,79.112 112.212,79.1 J1.5@112.452,79.1
  L1 (Signal) w0.5: v2(85.8,72.875) 85.813,72.887 86.939,72.887 X1.4@86.952,72.9 ; v2(86,85.5) 86.054,85.5 86.104,85.45 C16.1 ; v2(86,87.4) C17.1 ; v2(86.3,74.7) C5.1@87.252,74.7 ; v2(89.4,78) C7.1@90.352,78 ; X1.2@89.748,71 v2(90.9,71) ; C6.1@90.25,74.7 90.269,74.719 91.381,74.719 v2(91.4,74.7) 91.427,74.7 91.877,75.15 92.25,75.15 C9.1 ; C15.1 v2(92,83.4) 92,83.8 ; C7.1 91.85,78 92.1,78.25 C8.1 ; U3.1@92.037,88.788 93.187,88.788 v2(93.2,88.8) ; C18.1@94.302,84.952 94.302,84.054 94.25,84.002 v2(94.25,83.975) 94.277,83.975 94.327,84.025 95.51,84.025 95.585,84.1 R6.1 ; C12.1@95.2,81.7 95.212,81.712 95.212,82.688 v2(95.2,82.7) ; C13.1@97.1,71.452 97.15,71.402 v2(97.15,70.325) ; v2(97.2,60.4) J3.6@97.2,61.352 ; v2(100,70.6) C10.1@100,71.752 ; v2(102,71.6) R5.1@102,72.85 ; C11.1@102.173,79.025 v2(103.3,79.025) ; v2(104.65,89.6) C14.1 C14.1 ; C3.1@105.948,70.4 105.961,70.387 107.087,70.387 v2(107.1,70.4) ; J2.5@106.5,87.448 v2(106.5,88.4) ; U1.1@108.4,68.352 108.407,68.344 108.407,67.27 108.45,67.227 v2(108.45,67.2) ; v2(108.8,71.275) 108.781,71.294 108.781,72.433 C2.1@108.8,72.452 ; v2(110.225,71.3) 110.237,71.312 110.237,72.389 C1.1@110.3,72.452 ; C4.1@111.4,65.048 111.381,65.067 111.381,66.181 v2(111.4,66.2) ; R1.1@113.548,67.3 113.561,67.313 114.687,67.313 v2(114.7,67.3)
  other v1: 94.95,74.3 96.05,74.3 97.15,74.3 98.25,74.3 99.35,74.3 94.95,75.4 96.05,75.4 97.15,75.4 98.25,75.4 99.35,75.4 94.95,76.5 96.05,76.5 97.15,76.5 98.25,76.5 99.35,76.5 94.95,77.6 96.05,77.6 97.15,77.6 98.25,77.6 99.35,77.6 94.95,78.7 96.05,78.7 97.15,78.7 98.25,78.7 99.35,78.7 90.15,86.15 91.25,86.15 90.15,87.25 91.25,87.25
  other v3: 108,59 111,59 83,64 86,64 98,66 98,68 112,70 115,70 115,72 106,75 87,77 115,84 102,86 115,87 102,89
IMU_CPOUT: C18.2 U3.20 | length 1.6
  L1 (Signal) w0.3: U3.20 94.2,85.95 C18.2
IMU_INT: U2.45 U3.12 | length 16.6
  L1 (Signal) w0.26: U3.12@88.6,85.445 88.47,85.445 88,84.975 88,81.252 88.152,81.1 92.467,81.1 94.697,83.33 95.546,83.33 95.895,82.981 95.895,82.707 95.9,82.702 U2.45
IMU_REGOUT: C16.2 U3.10 | length 1.5
  L1 (Signal) w0.3: C16.2 U3.10
IMU_SCL: R3.1 U2.42 U3.23 | length 13.6
  L1 (Signal) w0.25: U3.23 93.65,87.45 94.2,86.9 v4(96,86.9) ; v4(98.4,86.9) 98.425,86.875 98.425,85.425 R3.1
  L1 (Signal) w0.26: U2.42 97.405,79.905 97.405,80.324 97.981,80.9 98.298,80.9 98.45,81.052 R3.1
  L4 (Signal) w0.25: v4(96,86.9) v4(98.4,86.9)
IMU_SDA: R4.1 U2.43 U3.24 | length 12.6
  L1 (Signal) w0.25: 93.1,87.955 97.243,87.955 97.45,87.748 R4.1 97.5,85.35 97.5,81.4 96.9,80.8 U2.43
LED_PWR_K: D1.K R1.2 | length 1.7
  L1 (Signal) w0.3: D1.K R1.2
MCU_BOOT0: R6.2 U2.44 | length 3.3
  L1 (Signal) w0.26: U2.44 96.4,82.93 96.57,83.1 R6.2
MCU_NRST: C14.2 J2.3 R7.1 U2.7 | length 33.1
  L1 (Signal) w0.2: v2(91.3,75.933) 91.642,76.275 92.705,76.275 92.73,76.25 U2.7 ; J2.3 J2.3@107.765,87.555
  L1 (Signal) w0.3: v4(105.725,90.725) 106.424,90.725 106.6,90.549 C14.2 106.7,89.5 107.65,89.5 107.8,89.65 R7.1 ; J2.3@107.765,87.555 R7.1@107.765,89.5
  L4 (Signal) w0.3: v2(91.3,75.933) 91.3,79.2 92.8,80.7 98.5,80.7 103.3,85.5 103.3,90.3 103.725,90.725 v4(105.725,90.725)
MCU_OSC_IN: C5.2 U2.5 X1.1 | length 12.1
  L1 (Signal) w0.2: X1.1 87.3,71 88.25,71.95 C5.2 88.25,76.95 88.55,77.25 U2.5
MCU_OSC_OUT: R2.2 U2.6 | length 4
  L1 (Signal) w0.2: R2.2 90.5,76.2 90.5,76.633 90.617,76.75 U2.6
MCU_PWR_A: D2.K R5.2 | length 1.5
  L1 (Signal) w0.26: R5.2 D2.K
MCU_PWR_K: D2.A U2.26 | length 1.5
  L1 (Signal) w0.26: U2.26 D2.A
MCU_VCAP1: C13.2 U2.22 | length 1.6
  L1 (Signal) w0.25: 98.65,72.35 98.85,72.55 98.85,72.775 98.9,72.825 U2.22
  L1 (Signal) w0.3: C13.2 98.65,72.35
MSU_PA4: J3.2 U2.14 | length 12.5
  L1 (Signal) w0.26: J3.2 92.225,69.625 94.9,72.3 U2.14
MSU_PA5: J3.3 U2.15 | length 12.2
  L1 (Signal) w0.26: J3.3 93.475,69.975 95.4,71.9 U2.15
MSU_PA6: J3.4 U2.16 | length 12
  L1 (Signal) w0.26: J3.4 94.6,61.85 94.6,69.9 95.9,71.2 U2.16
MSU_PA7: J3.5 U2.17 | length 11.6
  L1 (Signal) w0.26: J3.5 95.975,70.175 96.4,70.6 U2.17
MSU_SWCLK: J2.4 U2.37 | length 12.2
  L1 (Signal) w0.26: U2.37 99.9,80.6 100.3,81 104.8,81 107.73,83.93 J2.4
MSU_SWDIO: J2.2 U2.34 | length 13.5
  L1 (Signal) w0.26: U2.34 103.95,78.25 109,83.3 J2.2
MSU_SWO: J2.6 U2.39 | length 11.8
  L1 (Signal) w0.26: U2.39 98.905,79.905 98.905,80.505 100.5,82.1 104.5,82.1 106.4,84 106.4,86.19 J2.6
USB_D_N: J1.2 U2.32 | length 12.2
  L1 (Signal) w0.26: U2.32 100.815,77.25 100.833,77.268 112.597,77.268 J1.2
USB_D_P: J1.3 U2.33 | length 12.2
  L1 (Signal) w0.26: U2.33 100.815,77.75 100.833,77.732 112.597,77.732 J1.3
VBUS: C1.2 FB1.1 J1.1
XCAL_IN: C6.2 R2.1 X1.3 | length 3.2
  L1 (Signal) w0.2: X1.3@89.3,73.1 C6.2 R2.1
  L1 (Signal) w0.25: X1.3@89.3,73.1 X1.3
pads on no net: J1.4 J1.6 J1.7 J1.8 J1.9 J1.10 J1.11 J2.MH J3. U2.2 U2.3 U2.4 U2.10 U2.11 U2.12 U2.13 U2.18 U2.19 U2.20 U2.21 U2.25 U2.27 U2.28 U2.29 U2.30 U2.31 U2.38 U2.40 U2.41 U2.46 U3.2 U3.3 U3.4 U3.5 U3.6 U3.7 U3.14 U3.15 U3.16 U3.17 U3.19 U3.21 U3.22

## Polygon pours and split planes (outlines as drawn)
+5V on L1 (Signal) "+5V_L01_P004" (solid, pour order 4): 104.4,67.7 104.5,67.8 104.5,69.4 105,69.9 105,70.9 104.9,71 104,71 103.9,70.9 103.9,69.8 103.1,69 103.1,67.8 103.2,67.7
+5V on L1 (Signal) "+5V_L01_P001" (solid, pour order 1): 109.3,73.4 109.4,73.5 109.4,76 109.3,76.2 108.2,76.2 108.1,76 108.1,73.5 108.2,73.4
VBUS on L1 (Signal) "VBUS_L01_P000" (solid, pour order 0): 109.7,76.8 109.6,76.7 109.6,73.5 109.7,73.4 110.8,73.4 110.9,73.5 110.9,76 111.1,76.2 113.4,76.2 113.5,76.3 113.5,76.7 113.4,76.8
GND on L2 (GND) "GND_L02_P023" (solid, pour order 23): 82,91 cw(c83,91) 83,92 115,92 cw(c115,91) 116,91 116,59.003 cw(c115,59) 115,58 83,58 cw(c83,59) 82,59
GND on L2 (GND) (Mid2) "GND_L03_P028" (solid, pour order 28): 82,91 cw(c83,91) 83,92 115,92 cw(c115,91) 116,91 116,59.003 cw(c115,59) 115,58 83,58 cw(c83,59) 82,59

## Silkscreen, mask and mechanical layers (free items; w line width, h text height)
Top Overlay:
  text "MPU-6050" at 87.65,89.425 h0.5
  text "Daniel Mehany" at 82.937,86.296 h1.52 r270
  text "SWD" at 104.275,84.075 h0.5
  text "STM32" at 101.15,76.325 h0.5
  text "USB" at 111.625,72.725 h0.5
  text "XO" at 86.1,69.225 h0.5
  text "LDO" at 109.45,67.325 h0.5
  text "GPIO" at 97,63.5 h0.5
Mechanical 1:
  lines w0.3: 113,93 ccw(c113,93) 113,93 ; 113,93 113.73,93 cw(c113.73,89.934) 115.898,92.102 116.102,91.898 cw(c113.934,89.73) 117,89.73 117,89 117,60.27 cw(c113.934,60.27) 116.102,58.102 115.898,57.898 cw(c113.73,60.066) 113.73,57 84.27,57 cw(c84.27,60.066) 82.102,57.898 81.898,58.102 cw(c84.066,60.27) 81,60.27 81,63 81,89.73 cw(c84.066,89.73) 81.898,91.898 82.293,92.293 cw(c84,90.586) 84,93 113,93

## Text inside footprints (layer, text, board x,y; h text height)
D1: Mechanical 13 "+" at 113.092,62.192 h0.5 r90
D2: Mechanical 13 "+" at 100.617,74.758 h0.5